# Altium PCB lipo-supply_old.PcbDoc
Units mil, origin at the board's own origin, x right, y up, seen from the top; angles counter-clockwise.
Board outline 6000 x 4000 mil, 2 copper layers (Top Layer, Bottom Layer); 15 components, 15 nets, 53 pads, 0 vias.
Unrouted connection lines stored in the file: 28.
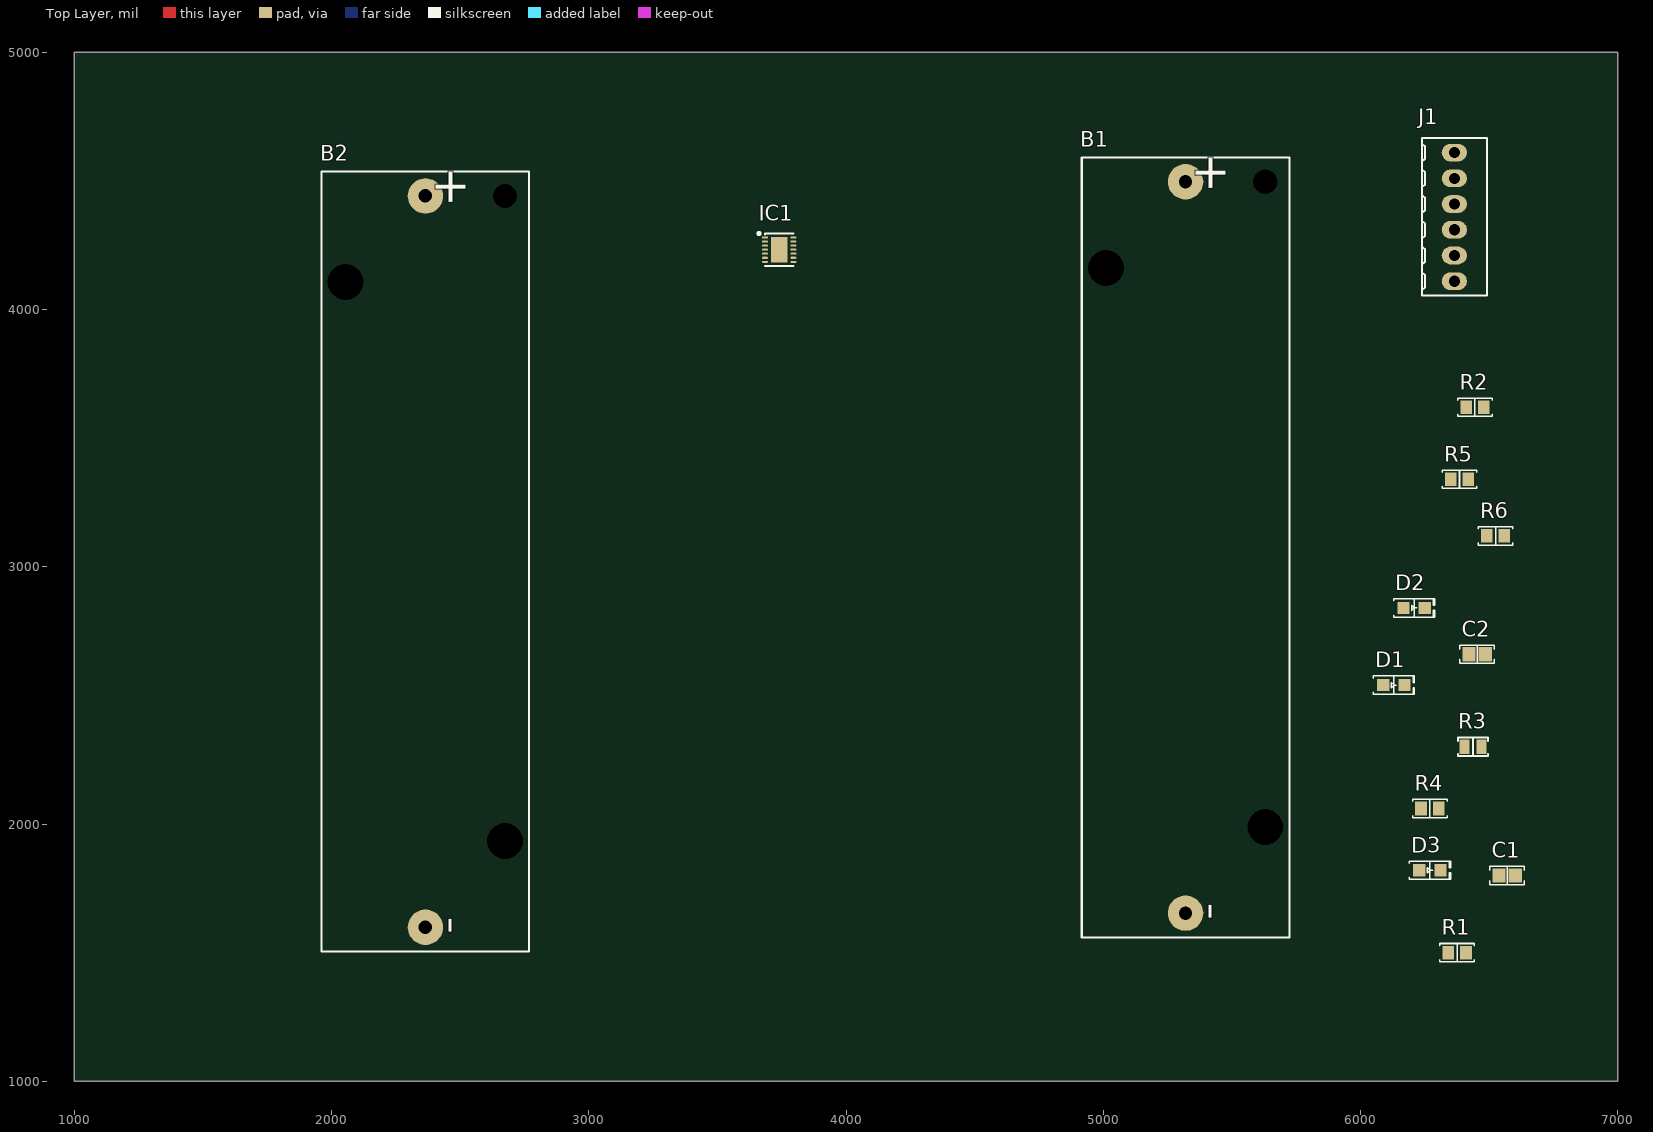
[diagram p0: Top Layer view]
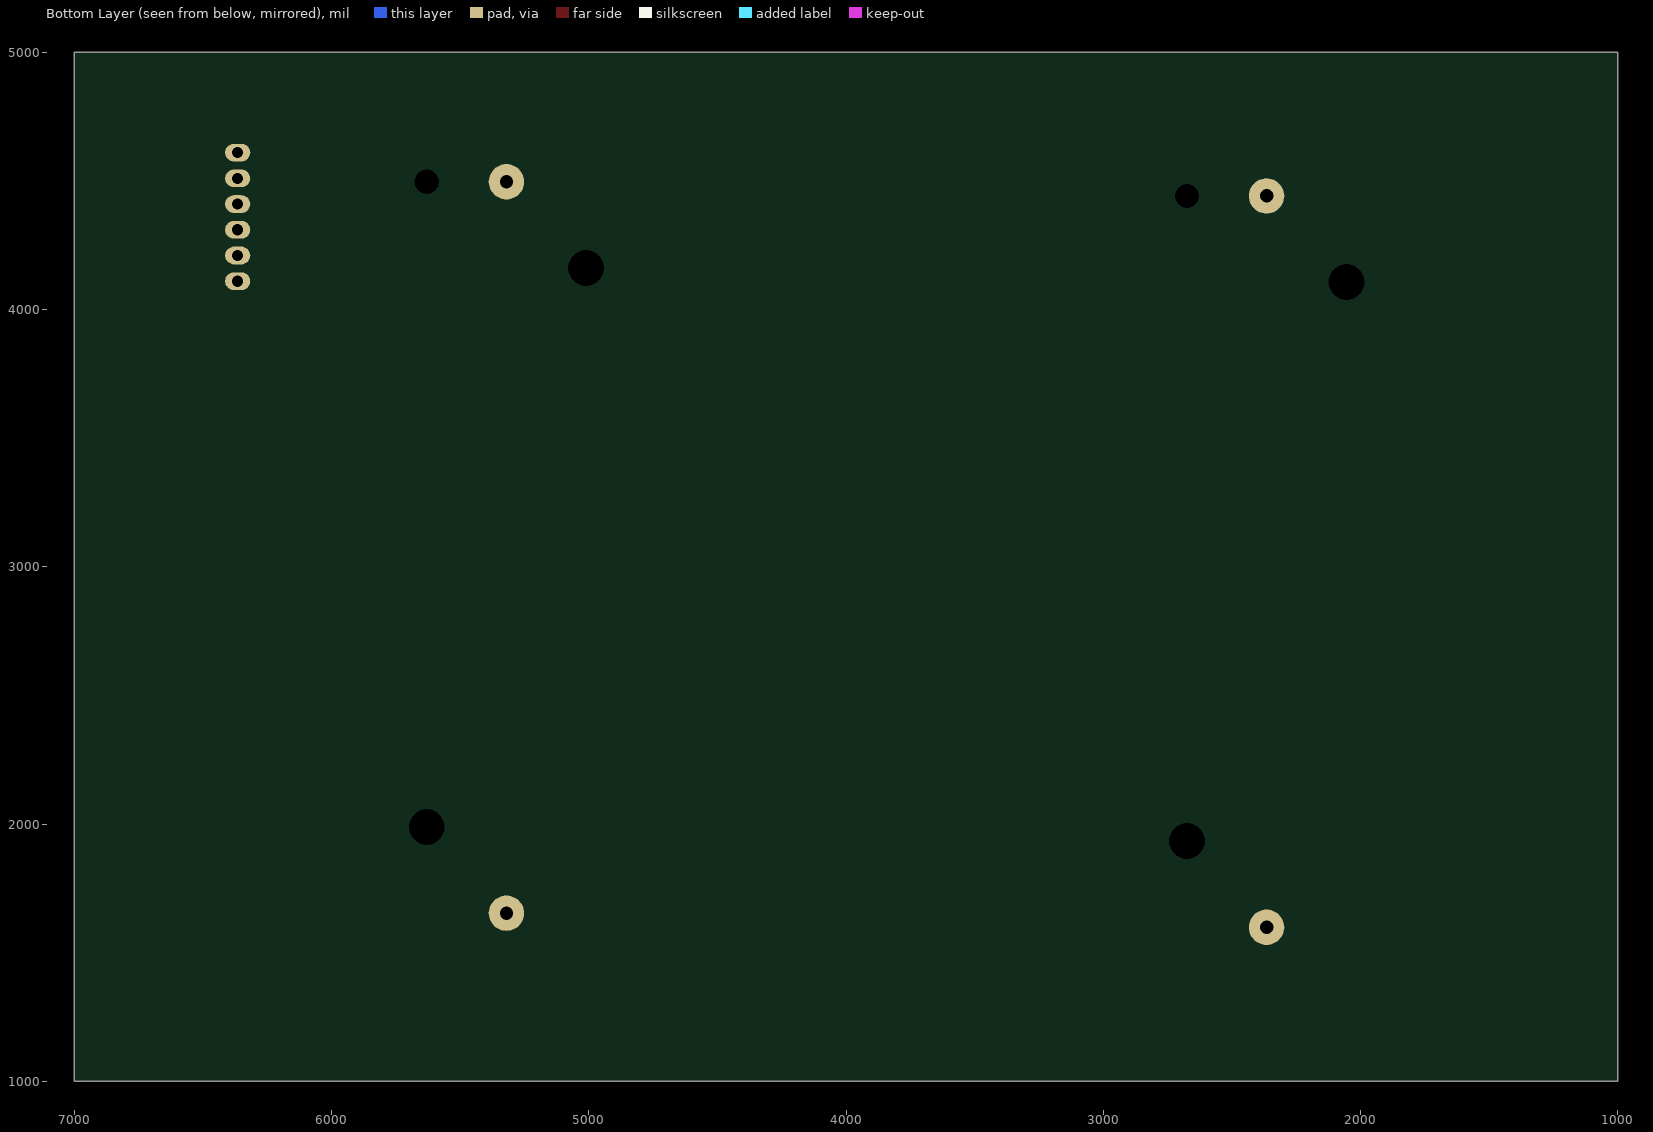
[diagram p1: Bottom Layer view, seen from below]

## Layer stack, top to bottom
Top Solder: solder mask 0.4, Solder Resist, Dk 3.5
Top Layer: signal copper 1.4
Dielectric 1: dielectric 12.6, FR-4, Dk 4.8
Bottom Layer: signal copper 1.4
Bottom Solder: solder mask 0.4, Solder Resist, Dk 3.5

## Board outline
1000,1000 7000,1000 7000,5000 1000,5000

## Design rules (kind name [scope] priority, off if disabled: settings)
Clearance [All] p1: gap=10 ignorepadtopadclearanceinfootprint=FALSE except(0: Arc-Hole Track-Hole SMDPad-Hole THPad-Hole Via-Hole Fill-Hole Poly-Hole Region-Hole Text-Hole)
PolygonConnect [All] p1: connectstyle=Relief reliefconductorwidth=10 reliefentries=4 polygonreliefangle="90 Angle" airgapwidth=10
RoomDefinition lipo-supply [InComponentClass('lipo-supply')] p1: confinementstyle=ConfineIn formatcopy=TRUE lockcomponents=FALSE outline 7010,1000 11480,1000 11480,4170 7010,4170
RoutingVias [All] p1: holewidth=28 width=50 viastyle="Through Hole" minholewidth=28 minwidth=50 maxholewidth=28 maxwidth=50
SolderMaskExpansion [All] p1: expansion=4 istentingtop=FALSE
Width [All] p1: maxlimit=10 minlimit=10 preferedwidth=10
30 further rules are at their usual default settings.

## Components (designator, comment, footprint, x,y, rotation, side; value= is the part's Value field where it differs from the comment)
B1 "1043" "KEYSTONE 1043" 5320,3075 r90 top
B2 "1043" "KEYSTONE 1043" 2365,3020 r90 top
C1 "10µF" "CAP 0805_2012" 6570,1800 r0 top (schematic designator C2)
C2 "0.1µF" "CAP 0805_2012" 6453.5,2660 r0 top (schematic designator C3)
D1 "Yellow" "LED 0805_2012 YELLOW" 6130,2540 r0 top
D2 "Yellow" "LED 0805_2012 YELLOW" 6208.66,2840 r0 top
D3 "Yellow" "LED 0805_2012 YELLOW" 6270,1820 r0 top
IC1 "AAT3663IWO-8.4-2-T1" "SKYWORKS TDFN-14 3X3MM" 3740.12,4232.76 r0 top (schematic designator U1)
J1 "282834-6" "TE 282834-6" 6365,4360 r90 top
R1 "470 kOhms" "RES 0805_2012" 6375.55,1500 r0 top
R2 "470 kOhms" "RES 0805_2012" 6445,3620 r0 top
R3 "NTC0805J10K" "NTC 0805_2012" 6437.52,2300 r0 top (schematic designator NTC1)
R4 "470 kOhms" "RES 0805_2012" 6270,2060 r0 top
R5 "470 kOhms" "RES 0805_2012" 6385,3340 r0 top
R6 "470 kOhms" "RES 0805_2012" 6525,3120 r0 top

## Footprints (in the part's own frame and the unit in brackets; to place one, negate y for a bottom-side part, rotate by r counter-clockwise, add the part's x,y. Pads: shape width x height; smd on the part's side, far side on the other; paste and mask are expansions set on the pad)
"CAP 0805_2012" [mm] "Chip Capacitor, 2-Leads, Body 2.00x1.20mm, IPC Medium Density"
  rect 1.3x1.4 smd: 1(-0.8,0) 2(0.8,0)
  silkscreen extent -1.7,-0.9 1.7,0.9, body extent -1,-0.64 1,0.64, height 1.26
"KEYSTONE 1043" [mm]
  round 3.5 hole 1.32 unplated: 1(36.11,0) 2(-36.11,0)
  rect 0x0 hole 3.55 unplated: M(-27.6,-7.87) M(27.6,7.87)
  rect 0x0 hole 2.39 unplated: M(36.11,-7.87)
  silkscreen extent -38.5,-10.25 38.5,10.25, body extent -38.53,-10.32 38.53,10.33, height 14.86
"LED 0805_2012 YELLOW" [mm] "Chip Diode, 2-Leads, Body 2.00x1.25mm, IPC Medium Density"
  rect 1.2x1.2 smd: 1(-1.05,0) 2(1.05,0)
  silkscreen extent -2.03,-0.9 2.03,0.9, body extent -1,-0.62 1,0.63, height 0.9
"NTC 0805_2012" [mm] "Chip Thermistor, 2-Leads, Body 2.00x1.25mm, IPC Medium Density"
  rect 1x1.45 smd: 1(-0.825,0) 2(0.825,0)
  silkscreen extent -1.5,-0.9 1.5,0.9, body extent -1,-0.64 1,0.64, height 1.27
"RES 0805_2012" [mm] "Chip Resistor, 2-Leads, Body 2.00x1.25mm, IPC Medium Density"
  rect 1.15x1.35 smd: 1(-0.875,0) 2(0.875,0)
  silkscreen extent -1.7,-0.9 1.7,0.9, body extent -0.95,-0.62 1.05,0.63, height 0.6
"SKYWORKS TDFN-14 3X3MM" [mm] "TDFN, 14-Leads, Body 3.00x3.00mm, Pitch 0.40mm, Thermal Pad 1.65x2.50mm, IPC Medium Density"
  oval 0.6x0.2 smd: 1(-1.4,1.2) 2(-1.4,0.8) 3(-1.4,0.4) 4(-1.4,0) 5(-1.4,-0.4) 6(-1.4,-0.8) 7(-1.4,-1.2) 8(1.4,-1.2) 9(1.4,-0.8) 10(1.4,-0.4) 11(1.4,0) 12(1.4,0.4) 13(1.4,0.8) 14(1.4,1.2)
  rect 1.65x2.5 smd: 15(0,0)
  silkscreen extent -2.12,-1.6 1.4,1.72, body extent -1.53,-1.53 1.53,1.53, height 0.8
"TE 282834-6" [mm]
  oval 1.75x2.5 hole 1.1: 1(-6.35,0) 2(-3.81,0) 3(-1.27,0) 4(1.27,0) 5(3.81,0) 6(6.35,0)
  silkscreen extent -7.78,-3.2 7.78,3.2, body extent -7.85,-3.25 7.85,3.25, height 10

## Part data
B1 B2: "BATTERY HOLDER 18650 PC PIN", Manufacturer="Keystone Electronics", Operating Temperature="-50°C ~ 145°C", Supplier Part Number 1=36-1043-ND, Battery Cell Size=18650, Battery Type, Function="Cylindrical, Holder", ComponentLink1Description=Datasheet, ComponentLink1URL=http://keyelco.com/userAssets/file/M65p27.pdf, ComponentLink2Description="DigiKey Link", ComponentLink2URL=http://digikey.com/product-detail/en/keystone-electronics/1043/36-1043-ND/2745669, Height Above Board="0.585\" (14.86mm)", LastUpdated="2/2/2020 9:19:56 AM", Lifecycle Status=Active, Minimum Order=1, Mounting Type="PCB, Through Hole", Number of Cells=1, Packaging=Unknown, Part Number=1043, Part Status=Active, PartId=2, Price=2.58, Series=-, Style="Holder (Open)", Supplier 1=DigiKey, Termination Style="PC Pin"
C1: library part EMK212BB7106MG-T, "CAP CER 10UF 16V X7R 0805", Device Package="0805 (2012 Metric)", Manufacturer="Taiyo Yuden", Operating Temperature="-55°C ~ 125°C", Supplier Part Number 1=587-3319-1-ND, Temperature Coefficient=X7R, Tolerance=±20%, Voltage - Rated=16V, Applications="General Purpose", Capacitance=10µF, ComponentLink1Description=Datasheet, ComponentLink1URL=http://www.yuden.co.jp/productdata/catalog/mlcc06_e.pdf, ComponentLink2Description="DigiKey Link", ComponentLink2URL=http://digikey.com/product-detail/en/taiyo-yuden/EMK212BB7106MG-T/587-3319-1-ND/4157364, LastUpdated="1/21/2020 12:03:05 AM", Lifecycle Status=Active, Minimum Order=1, Mounting Type="Surface Mount, MLCC", Package / Case="0805 (2012 Metric)", Packaging=TapeAndReel, Part Number=EMK212BB7106MG-T, Part Status=Active, PartId=3069, Price=0.11, Series=M, Size / Dimension="0.079\" L x 0.049\" W (2.00mm x 1.25mm)", Supplier 1=DigiKey, Thickness (Max)="0.053\" (1.35mm)"
C2: library part 0805B104K160CT, "CAP CER 0.1UF 16V X7R 0805", Device Package="0805 (2012 Metric)", Manufacturer="Walsin Technology Corporation", Operating Temperature="-55°C ~ 125°C", Supplier Part Number 1=1292-1565-1-ND, Temperature Coefficient=X7R, Tolerance=±10%, Voltage - Rated=16V, Applications="General Purpose", Capacitance=0.1µF, ComponentLink1Description=Datasheet, ComponentLink1URL=http://www.passivecomponent.com/wp-content/uploads/2018/10/MLCC.pdf, ComponentLink2Description="DigiKey Link", ComponentLink2URL=http://digikey.com/product-detail/en/walsin-technology-corporation/0805B104K160CT/1292-1565-1-ND/9355569, LastUpdated="1/21/2020 12:03:02 AM", Lifecycle Status=Active, Minimum Order=1, Mounting Type="Surface Mount, MLCC", Package / Case="0805 (2012 Metric)", Packaging=TapeAndReel, Part Number=0805B104K160CT, Part Status=Active, PartId=4882, Price=0.02, Series=-, Size / Dimension="0.079\" L x 0.049\" W (2.00mm x 1.25mm)", Supplier 1=DigiKey, Thickness (Max)="0.035\" (0.90mm)"
D1 D2: library part 5990110007F, "LED RED 0805 SMD", Current - Test=20mA, Device Package="0805 (2012 Metric)", Lens Color=0.80mm, Manufacturer=Dialight, Millicandela Rating=112mcd, Part Number=5990140007F, Supplier Device Package=0805, Supplier Part Number 1=350-4356-1-ND, Voltage - Forward (Vf) (Typ)=2.1V, Color=Yellow, ComponentLink1Description=Datasheet, ComponentLink1URL=http://www.dialightsignalsandcomponents.com/Assets/Brochures_And_Catalogs/Indication/CBI_SMD_new/Dialight_CBI_data_599-0805_Apr2018.pdf, ComponentLink2Description="DigiKey Link", ComponentLink2URL=http://digikey.com/product-detail/en/dialight/5990140007F/350-4356-1-ND/9385462, Configuration=Standard, Height (Max)=0.80mm, LastUpdated="1/21/2020 3:15:17 AM", Lens Size="1.40mm x 1.25mm", Lens Style="Rectangle with Flat Top", Lifecycle Status=Active, Minimum Order=1, Mounting Type="Surface Mount", Package / Case="0805 (2012 Metric)", Packaging=TapeAndReel, Part Status=Active, PartId=50, Price=0.07, Series=599, Size / Dimension="2.00mm L x 1.25mm W", Supplier 1=DigiKey, Viewing Angle=140°, Wavelength - Dominant=590nm
D3: library part 5975316507F, "LED GREEN 0805 SMD", Current - Test=20mA, Device Package="0805 (2012 Metric)", Lens Color=0.80mm, Manufacturer=Dialight, Millicandela Rating=112mcd, Part Number=5990140007F, Supplier Device Package=0805, Supplier Part Number 1=350-4356-1-ND, Voltage - Forward (Vf) (Typ)=2.1V, Color=Yellow, ComponentLink1Description=Datasheet, ComponentLink1URL=http://www.dialightsignalsandcomponents.com/Assets/Brochures_And_Catalogs/Indication/CBI_SMD_new/Dialight_CBI_data_599-0805_Apr2018.pdf, ComponentLink2Description="DigiKey Link", ComponentLink2URL=http://digikey.com/product-detail/en/dialight/5990140007F/350-4356-1-ND/9385462, Configuration=Standard, Height (Max)=0.80mm, LastUpdated="1/21/2020 3:15:17 AM", Lens Size="1.40mm x 1.25mm", Lens Style="Rectangle with Flat Top", Lifecycle Status=Active, Minimum Order=1, Mounting Type="Surface Mount", Package / Case="0805 (2012 Metric)", Packaging=TapeAndReel, Part Status=Active, PartId=50, Price=0.07, Series=599, Size / Dimension="2.00mm L x 1.25mm W", Supplier 1=DigiKey, Viewing Angle=140°, Wavelength - Dominant=590nm
IC1: "IC LI-ION CHARGER 14-DFN", Battery Pack Voltage=8.4V, Charge Current - Max=1A, Current - Charging="Constant - Programmable", Device Package="14-WFDFN Exposed Pad", Manufacturer="Skyworks Solutions Inc.", Operating Temperature="-40°C ~ 85°C (TA)", Supplier Device Package="14-TDFN (3x3)", Supplier Part Number 1=863-1544-2-ND, Voltage - Supply (Max)=13.2V, Battery Chemistry="Lithium Ion/Polymer", ComponentLink1Description=Datasheet, ComponentLink1URL=http://www.skyworksinc.com/uploads/documents/AAT3663_201878C.pdf, ComponentLink2Description="DigiKey Link", ComponentLink2URL=//digikey.com/product-detail/en/skyworks-solutions-inc/AAT3663IWO-8.4-2-T1/863-1544-2-ND/4753043, Fault Protection="Over Current, Over Temperature, Over Voltage, Short Circuit", Interface=USB, LastUpdated="12/6/2019 2:00:27 AM", Lifecycle Status=0, Minimum Order=1, Mounting Type="Surface Mount", Number of Cells=2, Package / Case="14-WFDFN Exposed Pad", Packaging=TapeAndReel, Part Number=AAT3663IWO-8.4-2-T1, Part Status=Active, PartId=23, Price=0.78, Programmable Features=Current, Series=BatteryManager™, Supplier 1=DigiKey
J1: library part 282834-3, "TERM BLK 3P SIDE ENT 2.54MM PCB", Color=Green, Current=10A, Manufacturer="TE Connectivity AMP Connectors", Supplier Part Number 1=A98337-ND, Voltage=150V, ComponentLink1Description=Datasheet, ComponentLink1URL=https://www.te.com/commerce/DocumentDelivery/DDEController?Action=srchrtrv&DocNm=282834&DocType=Customer+Drawing&DocLang=English, ComponentLink2Description="DigiKey Link", ComponentLink2URL=http://digikey.com/product-detail/en/te-connectivity-amp-connectors/282834-6/A98337-ND/1153267, LastUpdated="1/15/2020 4:16:31 AM", Lifecycle Status=Active, Mating Orientation="Horizontal with Board", Minimum Order=1, Mounting Type="Through Hole", Number of Levels=1, Packaging=Bulk, Part Number=282834-6, Part Status=Active, Pitch="0.100\" (2.54mm)", Positions Per Level=6, Price=4.72, Series=Buchanan, Supplier 1=DigiKey, Wire Gauge="16-30 AWG", Wire Termination="Screw - Rising Cage Clamp"
R1: library part KTR10EZPF1741, "RES SMD 1.74K OHM 1% 1/8W 0805", Device Package="0805 (2012 Metric)", Manufacturer="Panasonic Electronic Components", Operating Temperature="-55°C ~ 155°C", Part Number=ERJ-PB6D4703V, Power (Watts)="0.25W, 1/4W", Ratings=AEC-Q200, Supplier Device Package=0805, Supplier Part Number 1=P21323CT-ND, Temperature Coefficient=±50ppm/°C, Tolerance=±0.5%, ComponentLink1Description=Datasheet, ComponentLink1URL=https://industrial.panasonic.com/cdbs/www-data/pdf/RDM0000/AOA0000C328.pdf, ComponentLink2Description="DigiKey Link", ComponentLink2URL=http://digikey.com/product-detail/en/panasonic-electronic-components/ERJ-PB6D4703V/P21323CT-ND/6215578, Composition="Thick Film", Features="Automotive AEC-Q200, Pulse Withstanding", Height - Seated (Max)="0.028\" (0.70mm)", LastUpdated="1/21/2020 1:50:07 AM", Lifecycle Status=Active, Minimum Order=1, Number of Terminations=2, Package / Case="0805 (2012 Metric)", Packaging=TapeAndReel, Part Status=Active, PartId=27773, Price=0.03, Resistance="470 kOhms", Series=ERJ, Size / Dimension="0.079\" L x 0.049\" W (2.00mm x 1.25mm)", Supplier 1=DigiKey
R2: library part RT0805DRD0710KL, "RES SMD 10K OHM 0.5% 1/8W 0805", Device Package="0805 (2012 Metric)", Manufacturer="Panasonic Electronic Components", Operating Temperature="-55°C ~ 155°C", Part Number=ERJ-PB6D4703V, Power (Watts)="0.25W, 1/4W", Ratings=AEC-Q200, Supplier Device Package=0805, Supplier Part Number 1=P21323CT-ND, Temperature Coefficient=±50ppm/°C, Tolerance=±0.5%, ComponentLink1Description=Datasheet, ComponentLink1URL=https://industrial.panasonic.com/cdbs/www-data/pdf/RDM0000/AOA0000C328.pdf, ComponentLink2Description="DigiKey Link", ComponentLink2URL=http://digikey.com/product-detail/en/panasonic-electronic-components/ERJ-PB6D4703V/P21323CT-ND/6215578, Composition="Thick Film", Features="Automotive AEC-Q200, Pulse Withstanding", Height - Seated (Max)="0.028\" (0.70mm)", LastUpdated="1/21/2020 1:50:07 AM", Lifecycle Status=Active, Minimum Order=1, Number of Terminations=2, Package / Case="0805 (2012 Metric)", Packaging=TapeAndReel, Part Status=Active, PartId=27773, Price=0.03, Resistance="470 kOhms", Series=ERJ, Size / Dimension="0.079\" L x 0.049\" W (2.00mm x 1.25mm)", Supplier 1=DigiKey
R3: "THERMISTOR NTC 10KOHM 0805", B Value Tolerance=±5%, Device Package="0805 (2012 Metric)", Manufacturer="TE Connectivity Passive Product", Operating Temperature="-55°C ~ 125°C", Power - Max=125mW, Resistance in Ohms @ 25°C=10k, Supplier Part Number 1=A106104CT-ND, ComponentLink1Description=Datasheet, ComponentLink1URL=https://www.te.com/commerce/DocumentDelivery/DDEController?Action=srchrtrv&DocNm=1624345&DocType=Customer+Drawing&DocLang=English, ComponentLink2Description="DigiKey Link", ComponentLink2URL=http://digikey.com/product-detail/en/te-connectivity-passive-product/NTC0805J10K/A106104CT-ND/3477761, LastUpdated="1/21/2020 3:31:41 AM", Lifecycle Status=Active, Minimum Order=1, Mounting Type="Surface Mount", Package / Case="0805 (2012 Metric)", Packaging=TapeAndReel, Part Number=NTC0805J10K, Part Status=Active, PartId=574, Price=0.40, Resistance Tolerance=±5%, Series=Neohm, Supplier 1=DigiKey
R4 R5 R6: library part SR0805JR-7W2K2L, "RES SMD 2.2K OHM 5% 1/4W 0805", Device Package="0805 (2012 Metric)", Manufacturer="Panasonic Electronic Components", Operating Temperature="-55°C ~ 155°C", Part Number=ERJ-PB6D4703V, Power (Watts)="0.25W, 1/4W", Ratings=AEC-Q200, Supplier Device Package=0805, Supplier Part Number 1=P21323CT-ND, Temperature Coefficient=±50ppm/°C, Tolerance=±0.5%, ComponentLink1Description=Datasheet, ComponentLink1URL=https://industrial.panasonic.com/cdbs/www-data/pdf/RDM0000/AOA0000C328.pdf, ComponentLink2Description="DigiKey Link", ComponentLink2URL=http://digikey.com/product-detail/en/panasonic-electronic-components/ERJ-PB6D4703V/P21323CT-ND/6215578, Composition="Thick Film", Features="Automotive AEC-Q200, Pulse Withstanding", Height - Seated (Max)="0.028\" (0.70mm)", LastUpdated="1/21/2020 1:50:07 AM", Lifecycle Status=Active, Minimum Order=1, Number of Terminations=2, Package / Case="0805 (2012 Metric)", Packaging=TapeAndReel, Part Status=Active, PartId=27773, Price=0.03, Resistance="470 kOhms", Series=ERJ, Size / Dimension="0.079\" L x 0.049\" W (2.00mm x 1.25mm)", Supplier 1=DigiKey

## Nets (pads, with @x,y where several pads share a name; then routed paths per layer and width w, separated by ;. In a path a pad name is that pad's centre, name@x,y a point inside that pad or via, vN(x,y) a via of type N, cw(c..) or ccw(c..) an arc to the next point about the centre after c; other vN are vias at no path point)
EN: IC1.1 J1.3
GND: B2.2 C1.1 C2.1 IC1.4 IC1.15 J1.2 R3.2 R5.1 R6.1
IN: D1.1 D2.1 D3.1 IC1.8 IC1.9 J1.1
NetB1_1: B1.1 C1.2 IC1.6 IC1.7
NetB1_2: B1.2 B2.1
NetC2_2: C2.2 IC1.2
NetD1_2: D1.2 R1.2
NetD2_2: D2.2 R2.2
NetD3_2: D3.2 R4.2
NetIC1_3: IC1.3 R5.2
NetIC1_5: IC1.5 R3.1
NetIC1_10: IC1.10 R4.1
NetIC1_11: IC1.11 R2.1
NetIC1_12: IC1.12 R1.1
NetIC1_13: IC1.13 R6.2
pads on no net: B1.M B2.M IC1.14 J1.4 J1.5 J1.6

## Text inside footprints (layer, text, board x,y; h text height)
B1: Top Overlay "+" at 5522.76,4452.95 h236.22 r90; Top Overlay "-" at 5510.94,1626.18 h236.22 r90
B2: Top Overlay "+" at 2567.76,4397.95 h236.22 r90; Top Overlay "-" at 2555.94,1571.18 h236.22 r90